# Altium PCB GATEWAY_PCB.PcbDoc (part 1 of 2)
Units mm, origin at the board's own origin, x right, y up, seen from the top; angles counter-clockwise.
Board outline 96.14 x 95.25 mm, 2 copper layers (Top Layer, Bottom Layer); 195 components, 120 nets, 640 pads, 100 vias.
Unrouted connection lines stored in the file: 256.
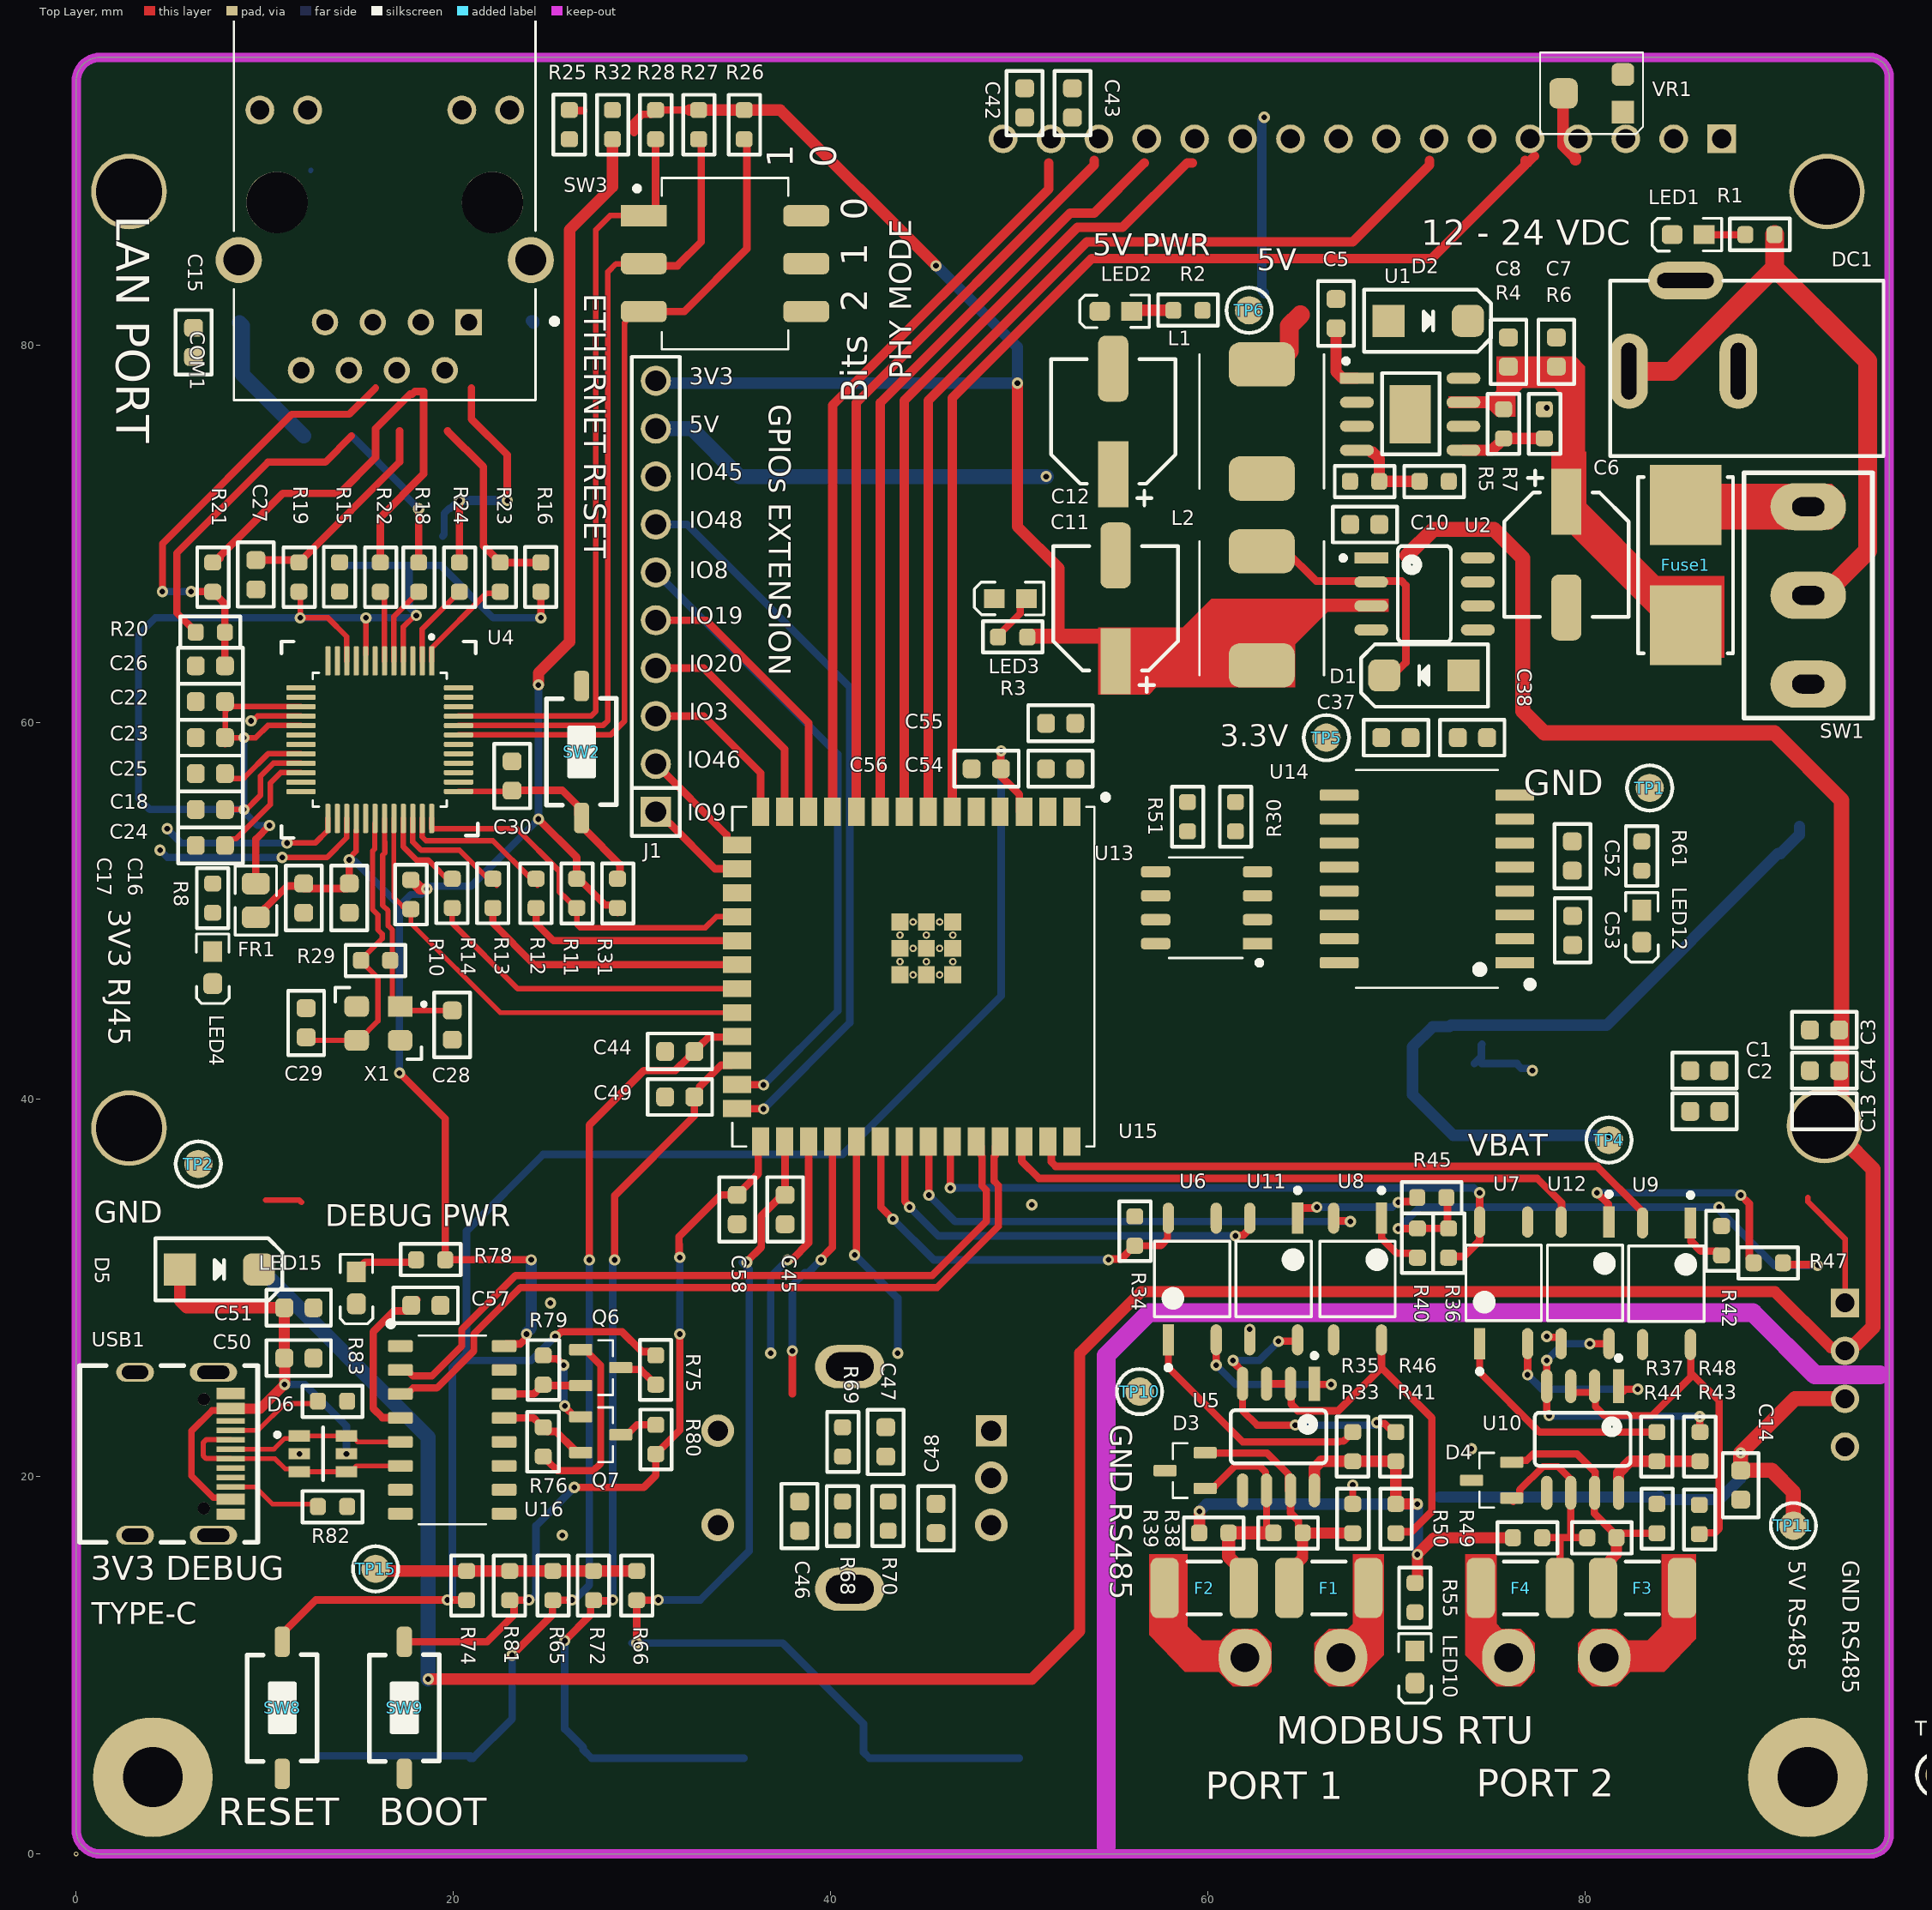
[diagram p0: Top Layer view]
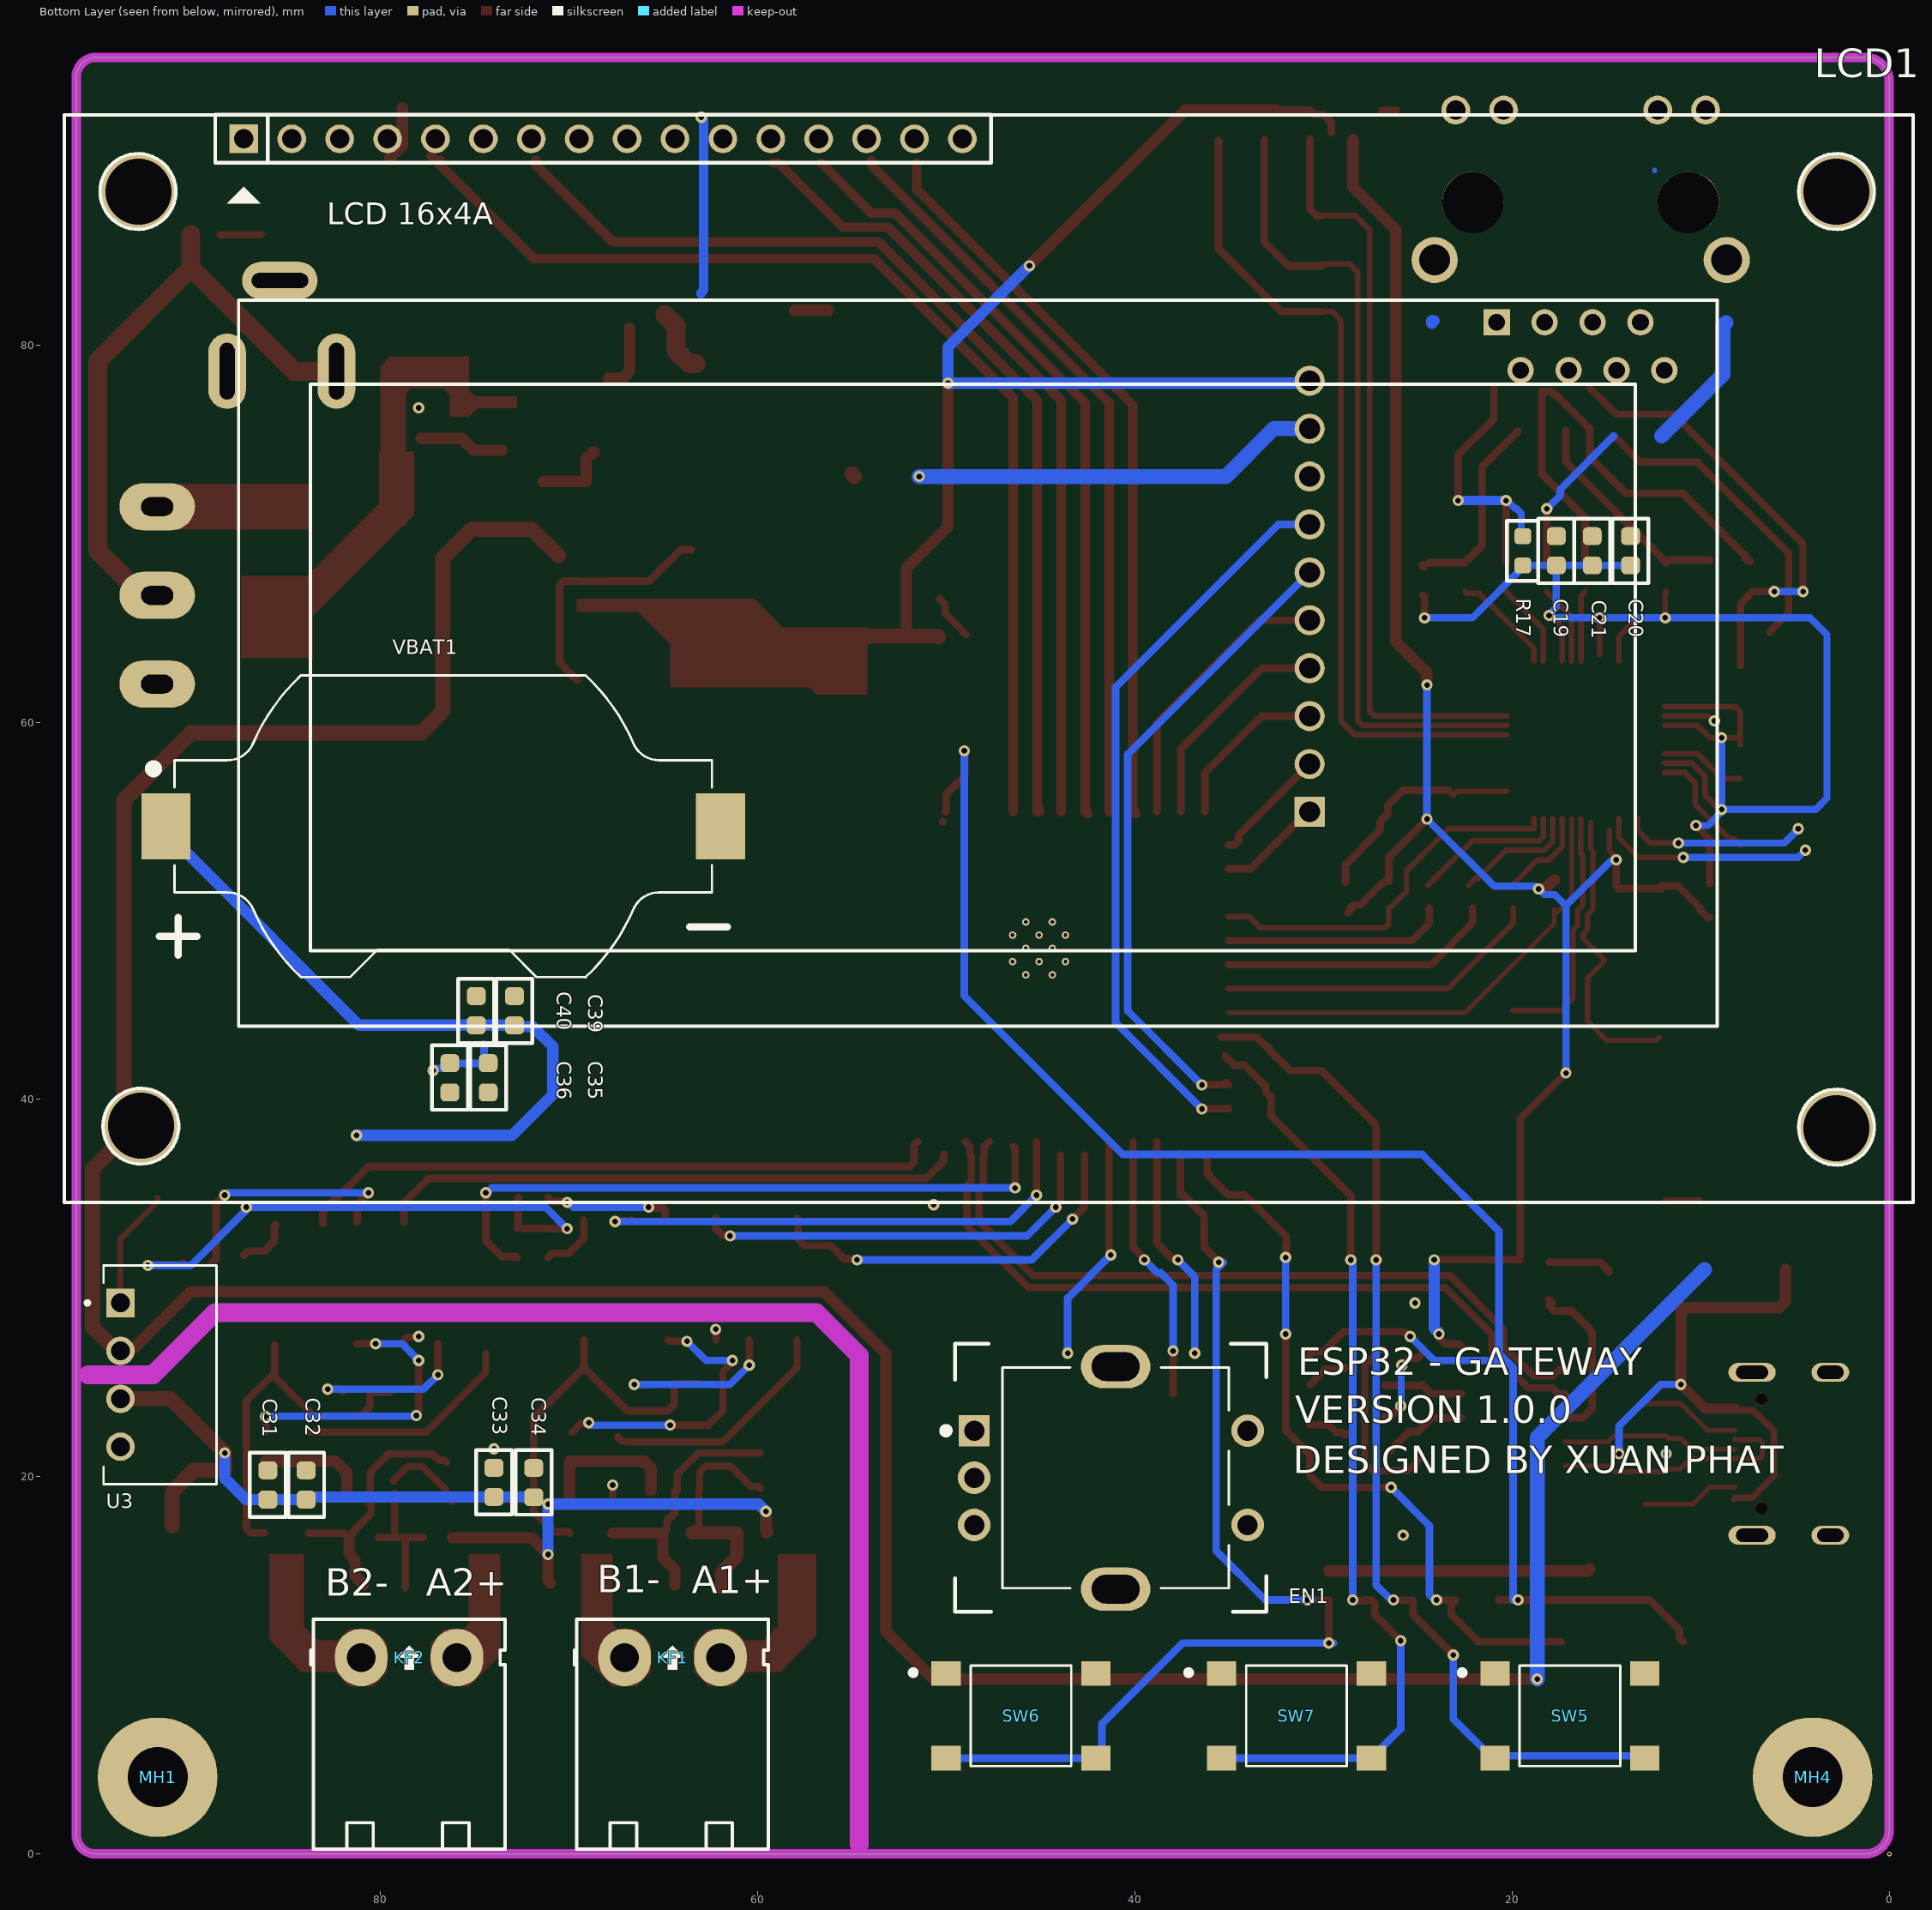
[diagram p1: Bottom Layer view, seen from below]
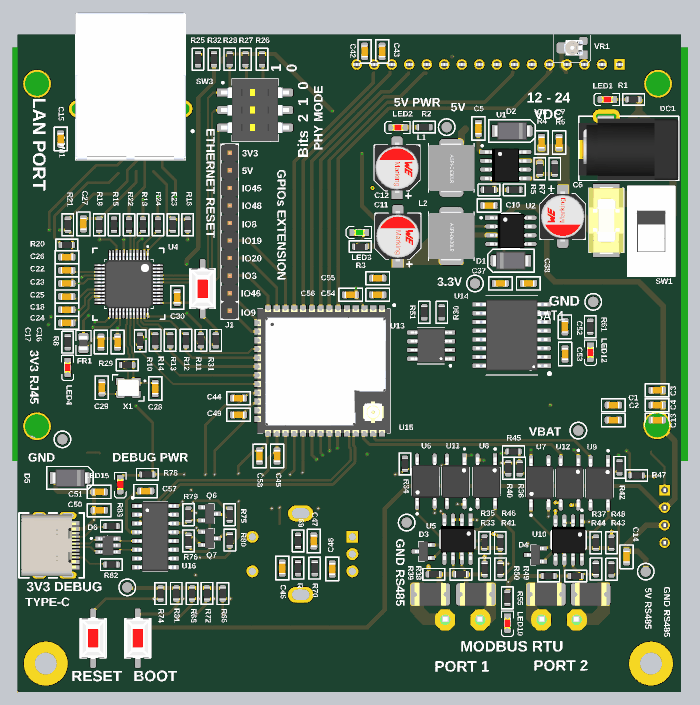
[diagram p3: 3D render of the assembled board from above, using the file's embedded part models]
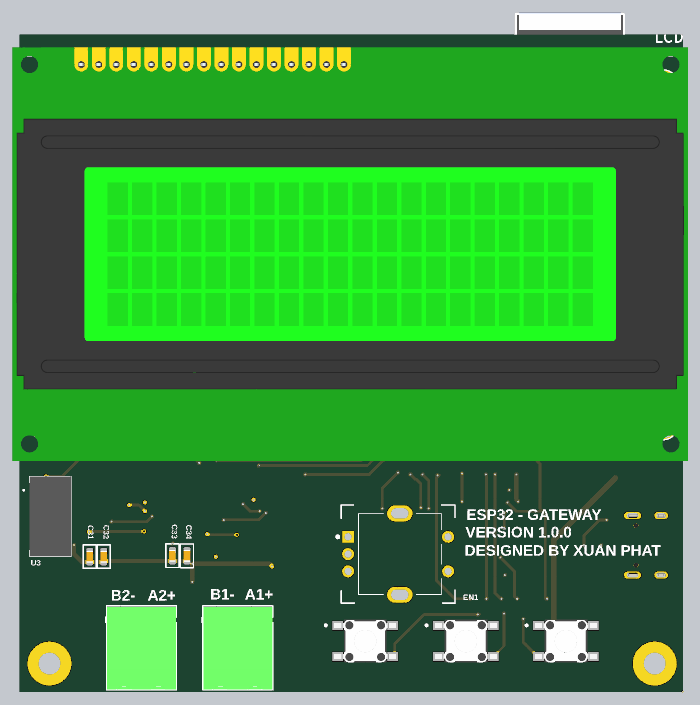
[diagram p4: 3D render of the assembled board from below, using the file's embedded part models]

## Layer stack, top to bottom
Top Solder: solder mask 0.0102, Solder Resist, Dk 3.5
Top Layer: signal copper 0.0356
Dielectric 1: dielectric 0.32, FR-4, Dk 4.8
Bottom Layer: signal copper 0.0356
Bottom Solder: solder mask 0.0102, Solder Resist, Dk 3.5

## Board outline
0,1.27 0,93.98 cw(c1.27,93.98) 1.27,95.25 95.097,95.25 cw(c95.097,94.208) 96.139,94.208 96.139,1.016 cw(c95.123,1.016) 95.123,0 1.27,0 cw(c1.27,1.27)

## Design rules (kind name [scope] priority, off if disabled: settings)
Clearance [All] p1: gap=0.203 ignorepadtopadclearanceinfootprint=TRUE
DiffPairsRouting [All] p1: maxlimit=0.254 minlimit=0.254 mostfreqgap=0.254 toplayer_minwidth=0.254 toplayer_maxwidth=0.381 toplayer_prefwidth=0.381 bottomlayer_minwidth=0.254 bottomlayer_maxwidth=0.381 bottomlayer_prefwidth=0.381 maxuncoupledlength=12.7
PolygonConnect [All] p1: connectstyle=Relief reliefconductorwidth=0.254 reliefentries=4 polygonreliefangle="90 Angle" airgapwidth=0.254
RoutingVias [All] p1: holewidth=0.3 width=0.6 viastyle="Through Hole" minholewidth=0.3 minwidth=0.6 maxholewidth=0.8 maxwidth=1
SolderMaskExpansion [All] p1: expansion=0.102 istentingtop=FALSE
SupplyNets "Schematic Supply Nets_10" [InNet('+VCC')] p1: voltage=0.000
SupplyNets "Schematic Supply Nets_9" [InNet('+5V_RS485')] p2: voltage=0.000
SupplyNets "Schematic Supply Nets_8" [InNet('+3.3V')] p3: voltage=0.000
SupplyNets "Schematic Supply Nets_5" [InNet('GND')] p4: voltage=0.000
SupplyNets "Schematic Supply Nets" [InNet('+5V')] p5: voltage=0.000
SupplyNets "Schematic Supply Nets_7" [InNet('+3.3V_RJ45')] p6: voltage=0.000
SupplyNets "Schematic Supply Nets_6" [InNet('VBAT')] p7: voltage=0.000
SupplyNets "Schematic Supply Nets_4" [InNet('VBUS')] p8: voltage=0.000
SupplyNets "Schematic Supply Nets_2" [InNet('GND_RS485')] p9: voltage=0.000
SupplyNets "Schematic Supply Nets_1" [InNet('GND_RJ45')] p10: voltage=0.000
UnRoutedNet [All] p1: checkbadconnections=TRUE
Width [All] p1: maxlimit=1.5 minlimit=0.25 preferedwidth=0.4
28 further rules are at their usual default settings.

## Classes and differential pairs
component class User_Interface: C42 C43 C44 C45 C46 C47 C48 C49 EN1 LCD1 R65 R66 R68 R69 R70 R72 SW5 SW6 SW7 VR1
component class RTC_and_EEPROM: C35 C36 C37 C38 C39 C40 LED12 MH1 MH3 MH4 R30 R51 R61 U13 U14
component class RS485_Port: C31 C32 C33 C34 D3 D4 F1 F2 F3 F4 KF1 KF2 LED10 R33 R34 R35 R36 R37 R38 R39 R40 R41 R42 R43 R44 R45 R46 R47 R48 R49 R50 R55 TP10 TP11 U5 U6 U7 U8 U9 U10 U11 U12
component class Power_Supply: C1 C2 C3 C4 C5 C6 C7 C8 C10 C11 C12 C13 C14 D1 D2 DC1 Fuse1 L1 L2 LED1 LED2 LED3 R1 R2 R3 R4 R5 R6 R7 SW1 TP1 TP2 TP4 TP5 TP6 U1 U2 U3 VBAT1 VCC
component class MCU: C50 C51 C52 C53 C54 C55 C56 C57 C58 D5 D6 J1 LED5 LED15 Q6 Q7 R9 R74 R75 R76 R78 R79 R80 R81 R82 R83 SW8 SW9 TP3 TP15 U15 U16 USB1
component class Ethernet: C15 C16 C17 C18 C19 C20 C21 C22 C23 C24 C25 C26 C27 C28 C29 C30 COM1 FR1 LED4 R8 R10 R11 R12 R13 R14 R15 R16 R17 R18 R19 R20 R21 R22 R23 R24 R25 R26 R27 R28 R29 R31 R32 SW2 SW3 U4 X1
differential pair I2C: +I2C_P -I2C_N
differential pair DEBUG_D: +DEBUG_D_P -DEBUG_D_N
differential pair CRYSTAL: +CRYSTAL_P -CRYSTAL_N
differential pair DATA_D: +DATA_D_P -DATA_D_N

## Components (designator, comment, footprint, x,y, rotation, side; value= is the part's Value field where it differs from the comment)
C1 "10uF/50V" "CAP - 0603" 86.36,41.529 r180 top
C2 "0.1uF/50V" "CAP - 0603" 86.36,39.37 r180 top
C3 "10uF/50V" "CAP - 0603" 92.71,43.688 r180 top
C4 "0.1uF/50V" "CAP - 0603" 92.71,41.529 r180 top
C5 "10nF/50V" "CAP - 0603" 66.802,81.661 r90 top
C6 "100uF/35V" ALU_CAP_6.3_7.7 79.019,68.885 r270 top
C7 "4.7uF/50V" "CAP - 0603" 78.486,79.629 r90 top
C8 "4.7uF/50V" "CAP - 0603" 75.946,79.629 r90 top
C10 "10uF/50V" "CAP - 0603" 68.326,70.485 r0 top
C11 "330uF/6.3V" ALU_CAP_6.3_7.7 55.118,66.04 r90 top
C12 "220uF/16V" ALU_CAP_6.3_7.7 54.991,75.946 r90 top
C13 "4.7uF/50V" "CAP - 0603" 92.71,39.37 r180 top
C14 "10uF/50V" "CAP - 0603" 88.265,19.558 r270 top
C15 "1nF/50V" "CAP - 0603" 6.223,80.137 r90 top
C16 "10uF/50V" "CAP - 0603" 14.478,50.673 r90 top
C17 "100nF/50V" "CAP - 0603" 12.065,50.673 r90 top
C18 "100nF/50V" "CAP - 0603" 7.112,55.372 r0 top
C19 "100nF/50V" "CAP - 0603" 17.653,69.088 r270 bottom
C20 "100nF/50V" "CAP - 0603" 13.716,69.088 r270 bottom
C21 "100nF/50V" "CAP - 0603" 15.748,69.088 r270 bottom
C22 "100nF/50V" "CAP - 0603" 7.112,61.087 r0 top
C23 "100nF/50V" "CAP - 0603" 7.112,59.182 r0 top
C24 "10nF/50V" "CAP - 0603" 7.112,53.467 r0 top
C25 "4.7uF/50V" "CAP - 0603" 7.112,57.277 r0 top
C26 "10nF/50V" "CAP - 0603" 7.112,62.992 r0 top
C27 "22nF/50V" "CAP - 0603" 9.525,67.818 r90 top
C28 "18pF/50V" "CAP - 0603" 19.939,43.942 r90 top
C29 "18pF/50V" "CAP - 0603" 12.192,44.069 r270 top
C30 "0.1uF/50V" "CAP - 0603" 23.114,57.15 r270 top
C31 "0.1uF/50V" "CAP - 0603" 85.979,19.558 r90 bottom
C32 "0.1uF/50V" "CAP - 0603" 83.947,19.558 r90 bottom
C33 "0.1uF/50V" "CAP - 0603" 73.986,19.697 r90 bottom
C34 "0.1uF/50V" "CAP - 0603" 71.882,19.685 r90 bottom
C35 "10uF/50V" "CAP - 0603" 74.295,41.148 r90 bottom
C36 "0.1uF/50V" "CAP - 0603" 76.327,41.148 r90 bottom
C37 "10uF/50V" "CAP - 0603" 69.977,59.182 r0 top
C38 "0.1uF/50V" "CAP - 0603" 74.041,59.182 r180 top
C39 "10uF/50V" "CAP - 0603" 72.898,44.704 r270 bottom
C40 "0.1uF/50V" "CAP - 0603" 74.93,44.704 r270 bottom
C42 "10uF/50V" "CAP - 0603" 50.292,92.837 r270 top
C43 "0.1uF/50V" "CAP - 0603" 52.832,92.837 r270 top
C44 "0.1uF/50V" "CAP - 0603" 32.004,42.545 r0 top
C45 "0.1uF/50V" "CAP - 0603" 37.592,34.163 r90 top
C46 "0.1uF/50V" "CAP - 0603" 38.354,17.907 r90 top
C47 "0.1uF/50V" "CAP - 0603" 42.926,21.844 r270 top
C48 "0.1uF/50V" "CAP - 0603" 45.593,17.78 r90 top
C49 "0.1uF/50V" "CAP - 0603" 32.004,40.132 r0 top
C50 "0.1uF/50V" "CAP - 0603" 11.811,26.289 r180 top
C51 "10uF/50V" "CAP - 0603" 11.811,28.956 r180 top
C52 "10uF/50V" "CAP - 0603" 79.337,52.905 r270 top
C53 "0.1uF/50V" "CAP - 0603" 79.351,48.958 r90 top
C54 "10uF/50V" "CAP - 0603" 52.197,57.531 r180 top
C55 "0.1uF/50V" "CAP - 0603" 52.197,59.944 r180 top
C56 "0.1uF/50V" "CAP - 0603" 48.26,57.531 r0 top
C57 "100nF/50V" "CAP - 0603" 18.542,29.083 r180 top
C58 "0.1uF/50V" "CAP - 0603" 35.052,34.163 r90 top
COM1 "RJ45" RJ45 16.362,87.556 r0 top
D1 "SS54" SS54 73.595,62.472 r180 top
D2 "SS54" SS54 69.564,81.291 r0 top
D3 "SM712-02HTG" SOT23-3 58.801,20.32 r180 top
D4 "SM712-02HTG" SOT23-3 75.057,19.812 r180 top
D5 "SS54" SS54 5.461,30.988 r0 top
D6 "SRV05-4" SOT-23-6 13.081,21.209 r0 top
DC1 "Jack_DC" "DC_5.5 X 2.1MM" 85.238,78.613 r180 top
EN1 "Encoder - EC11" "ENCODER - EC11" 41.021,19.939 r180 bottom locked
F1 "MF-MSMF020-2" "FUSE 4.55X3.24 MM" 66.421,14.097 r0 top
F2 "MF-MSMF020-2" "FUSE 4.55X3.24 MM" 59.817,14.097 r180 top
F3 "MF-MSMF020-2" "FUSE 4.55X3.24 MM" 83.058,14.097 r0 top
F4 "MF-MSMF020-2" "FUSE 4.55X3.24 MM" 76.581,14.097 r180 top
FR1 "120R" FR-0805 9.525,50.546 r90 top
Fuse1 "Fuse - 4A" SMD-2 85.344,68.326 r270 top
J1 "Jump 10 Pins" JPX1-10PINS-2.54MM 30.734,55.245 r90 top
KF1 "KF 2 Pins" KF-5.08-2-R 67.056,10.414 r180 bottom
KF2 "KF 2 Pins" KF-5.08-2-R 81.026,10.414 r180 bottom
L1 "15uH/3A" L_SMD_0630 62.865,75.946 r270 top
L2 "22uH/3A" L_SMD_0630 62.865,66.04 r270 top
LCD1 "LCD 20x4A" LCD-20x4A-4-Holes 87.249,90.932 r180 bottom
LED1 "RED" RED_LED_0603 85.471,85.852 r180 top
LED2 "RED" RED_LED_0603 55.118,81.788 r180 top
LED3 "GREEN" GREEN_LED_0603 49.53,66.548 r180 top
LED4 "RED" RED_LED_0603 7.239,46.99 r270 top
LED5 "TEST_LED" RED_LED_0603 106.426,9.144 r90 top
LED10 "RED" RED_LED_0603 70.993,9.906 r270 top
LED12 "RED" RED_LED_0603 83.022,49.185 r270 top
LED15 "RED_DEBUG" RED_LED_0603 14.858,30.009 r270 top
MH1 "MOUNTING HOLE" "MOUNTING HOLE_2" 91.796,4.089 r180 bottom
MH3 "MOUNTING HOLE" "MOUNTING HOLE_2" 11.684,113.03 r0 top
MH4 "MOUNTING HOLE" "MOUNTING HOLE_2" 4.039,4.089 r180 bottom
Q6 "SS8050" SOT23-3 27.813,25.781 r0 top
Q7 "SS8050" SOT23-3 27.813,22.225 r0 top
R1 "10K/1%" "RES - 0603" 89.281,85.852 r180 top
R2 "1K/1%" "RES - 0603" 58.953,81.839 r180 top
R3 "330R/1%" "RES - 0603" 49.657,64.516 r180 top
R4 "10K/1%" "RES - 0603" 75.692,75.819 r270 top
R5 "1K/1%" "RES - 0603" 68.326,72.771 r0 top
R6 "1.5K/1%" "RES - 0603" 77.851,75.819 r90 top
R7 "330R/1%" "RES - 0603" 72.009,72.771 r0 top
R8 "330R/1%" "RES - 0603" 7.239,50.673 r270 top
R9 "330R/1%" "RES - 0603" 103.632,27.686 r0 top
R10 "10K/1%" "RES - 0603" 17.742,50.863 r90 top
R11 "10K/1%" "RES - 0603" 26.543,50.927 r90 top
R12 "22R/1%" "RES - 0603" 24.384,50.927 r270 top
R13 "22R/1%" "RES - 0603" 22.098,50.927 r270 top
R14 "22R/1%" "RES - 0603" 19.939,50.927 r270 top
R15 "12.4K/1%" "RES - 0603" 13.97,67.704 r270 top
R16 "49.9R/1%" "RES - 0603" 24.638,67.691 r270 top
R17 "49.9R/1%" "RES - 0603" 19.431,69.088 r270 bottom
R18 "22R/1%" "RES - 0603" 18.161,67.691 r90 top
R19 "22R/1%" "RES - 0603" 11.811,67.691 r90 top
R20 "49.9R/1%" "RES - 0603" 7.112,64.77 r180 top
R21 "49.9R/1%" "RES - 0603" 7.239,67.691 r90 top
R22 "22R/1%" "RES - 0603" 16.129,67.691 r90 top
R23 "22R/1%" "RES - 0603" 22.479,67.691 r90 top
R24 "22R/1%" "RES - 0603" 20.32,67.691 r90 top
R25 "330R/1%" "RES - 0603" 26.15,91.682 r270 top
R26 "10K/1%" "RES - 0603" 35.421,91.682 r90 top
R27 "10K/1%" "RES - 0603" 33.008,91.682 r90 top
R28 "10K/1%" "RES - 0603" 30.722,91.682 r90 top
R29 "1M/1%" "RES - 0603" 15.875,47.371 r0 top
R30 "4.7K/1%" "RES - 0603" 61.468,54.991 r90 top
R31 "10K/1%" "RES - 0603" 28.702,50.927 r90 top
R32 "330R/1%" "RES - 0603" 28.436,91.682 r90 top
R33 "2.2K/1%" "RES - 0603" 67.691,17.78 r90 top
R34 "2K/1%" "RES - 0603" 56.134,33.02 r90 top
R35 "1K/1%" "RES - 0603" 67.691,21.59 r270 top
R36 "2K/1%" "RES - 0603" 72.771,32.385 r90 top
R37 "1K/1%" "RES - 0603" 83.82,21.59 r270 top
R38 "120R/1%" "RES - 0603" 64.262,17.018 r0 top
R39 "2.2K/1%" "RES - 0603" 60.325,17.018 r0 top
R40 "330R/1%" "RES - 0603" 71.12,32.385 r90 top
R41 "2K/1%" "RES - 0603" 69.977,17.78 r90 top
R42 "330R/1%" "RES - 0603" 87.249,32.512 r90 top
R43 "2K/1%" "RES - 0603" 86.07,17.728 r90 top
R44 "2.2K/1%" "RES - 0603" 83.82,17.78 r90 top
R45 "330R/1%" "RES - 0603" 71.882,34.798 r0 top
R46 "2K/1%" "RES - 0603" 69.977,21.59 r270 top
R47 "330R/1%" "RES - 0603" 89.725,31.339 r0 top
R48 "2K/1%" "RES - 0603" 86.106,21.59 r270 top
R49 "120R/1%" "RES - 0603" 80.899,16.764 r0 top
R50 "2.2K/1%" "RES - 0603" 76.962,16.764 r0 top
R51 "4.7K/1%" "RES - 0603" 58.928,54.991 r90 top
R55 "1K/1%" "RES - 0603" 70.993,13.589 r270 top
R61 "330R/1%" "RES - 0603" 83.02,52.905 r270 top
R65 "10K/1%" "RES - 0603" 25.273,14.224 r90 top
R66 "10K/1%" "RES - 0603" 29.718,14.224 r90 top
R68 "10K/1%" "RES - 0603" 40.64,17.907 r270 top
R69 "10K/1%" "RES - 0603" 40.64,21.844 r90 top
R70 "10K/1%" "RES - 0603" 43.053,17.907 r270 top
R72 "10K/1%" "RES - 0603" 27.432,14.224 r270 top
R74 "10K/1%" "RES - 0603" 20.701,14.224 r90 top
R75 "0R/1%" "RES - 0603" 30.734,25.654 r270 top
R76 "10K/1%" "RES - 0603" 24.765,21.844 r270 top
R78 "330R/1%" "RES - 0603" 18.796,31.496 r180 top
R79 "10K/1%" "RES - 0603" 24.765,25.654 r90 top
R80 "0R/1%" "RES - 0603" 30.734,21.971 r90 top
R81 "10K/1%" "RES - 0603" 22.987,14.224 r270 top
R82 "5.1K/1%" "RES - 0603" 13.589,18.415 r0 top
R83 "5.1K/1%" "RES - 0603" 13.589,24.003 r0 top
SW1 "Switch" DIP_SWITCH_3_PINS_0 91.846,66.725 r270 top
SW2 "Button 2 Pins" "SMD SWITCH 2 PINS" 26.797,58.42 r270 top
SW3 "DIP Switch 3 Pins" "SMD - SW - 3PINS" 34.405,84.316 r0 top
SW5 "Button 4 Pins" SW-SMD-6X6MM 16.931,7.322 r180 bottom
SW6 "Button 4 Pins" SW-SMD-6X6MM 46.04,7.322 r180 bottom
SW7 "Button 4 Pins" SW-SMD-6X6MM 31.435,7.322 r180 bottom
SW8 "Button 2 Pins" "SMD SWITCH 2 PINS" 10.922,7.747 r90 top
SW9 "Button 2 Pins" "SMD SWITCH 2 PINS" 17.399,7.747 r90 top
TP1 "GND" "TEST POINT" 83.439,56.515 r0 top
TP2 "GND" "TEST POINT" 6.477,36.576 r0 top
TP3 "DEBUG PWR" "TEST POINT" 98.806,4.191 r0 top
TP4 "VBAT" "TEST POINT" 81.28,37.846 r0 top
TP5 "+3.3V" "TEST POINT" 66.294,59.182 r0 top
TP6 "+5V" "TEST POINT" 62.195,81.839 r0 top
TP10 "GND_RS485" "TEST POINT" 56.388,24.511 r90 top
TP11 "GND_RS485" "TEST POINT" 91.059,17.399 r90 top
TP15 "DEBUG PWR" "TEST POINT" 15.875,15.113 r90 top
U1 "TPS5430" TPS5430 70.764,76.352 r0 top
U2 "XL1509" SOP_8 71.501,66.802 r0 top
U3 "B0505S/1W" B0505S/1W 91.694,25.4 r270 bottom
U4 "W5500" LQFP-48 16.096,59.073 r270 top
U5 "MAX485ESA" SOP_8 63.754,22.098 r270 top
U6 "TLP185" SOP-4 59.182,30.48 r90 top
U7 "TLP185" SOP-4 75.692,30.276 r90 top
U8 "TLP185" SOP-4 67.945,30.48 r270 top
U9 "TLP185" SOP-4 84.328,30.226 r270 top
U10 "MAX485ESA" SOP_8 79.883,21.971 r270 top
U11 "TLP185" SOP-4 63.5,30.48 r270 top
U12 "TLP185" SOP-4 80.01,30.276 r270 top
U13 "AT24C256C" SOIC-8 59.944,50.165 r180 top
U14 "DS3231SN#" "SOIC -16" 71.628,51.689 r180 top
U15 "ESP32-S3-WROOM-1U-N8R2" ESP32-S3-WROOM-1U-N8R2 52.802,55.259 r270 top
U16 "CH340C" SOIC127P600X180-16N 19.939,22.479 r0 top
USB1 "USB Type C" TYPE-C-16PINS 4.191,21.209 r270 top
VBAT1 "3V" "CR2032 - SMD" 76.676,54.483 r180 bottom locked
VR1 "20K" "VR 3X3" 80.417,93.345 r90 top
X1 "CRYSTAL 8MHz" "CRYSTAL - 3.2 X 2.5 MM" 16.024,44.031 r180 top

## Footprints (in the part's own frame and the unit in brackets; to place one, negate y for a bottom-side part, rotate by r counter-clockwise, add the part's x,y. Pads: shape width x height; smd on the part's side, far side on the other; paste and mask are expansions set on the pad)
ALU_CAP_6.3_7.7 [mm] "6.3x7.7mm"
  rect 3.5x1.6 smd: 1(-2.8,0)
  rrect50% 3.5x1.6 smd: 2(2.8,0)
  silkscreen extent -4.44,-3.3 3.3,3.3, body extent -3.65,-3.3 3.65,3.3, height 7.65
B0505S/1W [mm]
  rect 1.508x1.508 / inner round 1.508 / far side rect 1.508x1.508 hole 1: 1(-3.81,-2.1)
  round 1.508 hole 1: 2(-1.27,-2.1) 3(1.27,-2.1) 4(3.81,-2.1)
  silkscreen extent -5.8,-3.95 5.8,3, body extent -5.8,-3.01 5.8,2.99, height 10.16
"CAP - 0603" [mm] "Capacitor SMD - 1608 - KEMET"
  rrect50% 0.95x1 smd: 1(-0.775,0) 2(0.775,0)
  silkscreen extent -1.7,-0.95 1.72,0.95, body extent -0.87,-0.48 0.87,0.48, height 1
"CR2032 - SMD" [mm] "SMD"
  rect 2.6x3.5 smd: N(14.7,0) P(-14.7,0)
  silkscreen extent -15.42,-8.01 15.06,8.01, body extent -15.65,-8 15.65,8, height 5.55
"CRYSTAL - 3.2 X 2.5 MM" [mm] "SMD"
  rect 1.3x1.1 smd: 1(-1.15,-0.9)
  rrect50% 1.3x1.1 smd: 2(1.15,-0.9) 3(1.15,0.9) 4(-1.15,0.9)
  silkscreen extent -2.51,-1.9 2.29,1.9, body extent -1.6,-1.25 1.6,1.25, height 0.8
"DC_5.5 X 2.1MM" [mm]
  oval 2x4 hole 0.8 slot 3 at 90 deg: 1(2.9,0) 2(-2.9,0)
  oval 4x2 hole 0.8 slot 3 at 0 deg: 3(-0.1,-4.8)
  silkscreen extent -10.6,-4.8 3.9,4.5, body extent -10.6,-4.9 3.9,4.5, height 10.7
DIP_SWITCH_3_PINS_0 [mm]
  oval 2.5x4 hole 1 slot 1.7 at 90 deg: 1(-4.7,0) 2(0,0) 3(4.7,0)
  silkscreen extent -6.5,-3.4 6.5,3.4, body extent -6.5,-3.4 6.5,3.4, height 10.76
"ENCODER - EC11" [mil]
  rect 65x65 / inner round 65 / far side rect 65x65 hole 42: A(-295.28,98.43)
  round 68 hole 42: B(-295.28,-98.43) C(-295.28,0) D(275.59,98.43) E(275.59,-98.43)
  oval 145x90 hole 60 slot 100 at 0 deg: SH1(0,232.28) SH2(0,-232.28)
  silkscreen extent -358,-280 315,280, body extent -303,-276 283,276, height 834
ESP32-S3-WROOM-1U-N8R2 [mm] "SMD"
  rect 1.5x0.9 smd: 1(0,0) 2(0,-1.27) 3(0,-2.54) 4(0,-3.81) 5(0,-5.08) 6(0,-6.35) 7(0,-7.62) 8(0,-8.89) 9(0,-10.16) 10(0,-11.43) 11(0,-12.7) 12(0,-13.97) 13(0,-15.24) 14(0,-16.51) 27(17.5,-16.51) 28(17.5,-15.24) 29(17.5,-13.97) 30(17.5,-12.7) 31(17.5,-11.43) 32(17.5,-10.16) 33(17.5,-8.89) 34(17.5,-7.62) 35(17.5,-6.35) 36(17.5,-5.08) 37(17.5,-3.81) 38(17.5,-2.54) 39(17.5,-1.27) 40(17.5,0)
  rect 0.9x1.5 smd: 15(1.765,-17.76) 16(3.035,-17.76) 17(4.305,-17.76) 18(5.575,-17.76) 19(6.845,-17.76) 20(8.115,-17.76) 21(9.385,-17.76) 22(10.655,-17.76) 23(11.925,-17.76) 24(13.195,-17.76) 25(14.465,-17.76) 26(15.735,-17.76)
  rect 0.9x0.9 smd: 41_1(5.85,-6.32) 41_2(7.25,-6.32) 41_3(8.65,-6.32) 41_4(5.85,-7.72) 41_5(7.25,-7.72) 41_6(8.65,-7.72) 41_7(5.85,-9.12) 41_8(7.25,-9.12) 41_9(8.65,-9.12)
  round 0.4 hole 0.2 mask+0: 41_10(6.55,-6.32) 41_11(7.95,-6.32) 41_12(5.85,-7.02) 41_13(7.25,-7.02) 41_14(8.65,-7.02) 41_15(6.55,-7.72) 41_16(7.95,-7.72) 41_17(5.85,-8.42) 41_18(7.25,-8.42) 41_19(8.65,-8.42) 41_20(6.55,-9.12) 41_21(7.95,-9.12)
  silkscreen extent -0.86,-18.01 17.75,1.88, body extent -0.25,-18.01 17.75,1.19, height 3.35
FR-0805 [mm] "SMD"
  rrect50% 1.14x1.47 smd: 1(-0.89,0) 2(0.89,0)
  silkscreen extent -1.84,-1.1 1.83,1.1, body extent -1,-0.63 1,0.63, height 1.05
"FUSE 4.55X3.24 MM" [mm]
  rrect50% 1.5x3.2 smd: 1(-2.1,0) 2(2.1,0)
  silkscreen extent -0.89,-1.4 0.89,1.4, body extent -2.27,-1.62 2.27,1.62, height 0.85
GREEN_LED_0603 [mm] "SMD"
  rect 1.1x1 smd mask+0.1: 1(-0.853,-0.002) 2(0.847,-0.002)
  silkscreen extent -1.78,-0.88 1.91,0.86, body extent -0.81,-0.51 0.81,0.49, height 0.98
JPX1-10PINS-2.54MM [mm] "DIP"
  rect 1.6x1.6 hole 1.1: 1(0,0)
  round 1.6 hole 1.1: 2(2.54,0) 3(5.08,0) 4(7.62,0) 5(10.16,0) 6(12.7,0) 7(15.24,0) 8(17.78,0) 9(20.32,0) 10(22.86,0)
  silkscreen extent -1.27,-1.27 24.13,1.27, body extent -1.27,-1.27 24.13,1.27, height 8.54
KF-5.08-2-R [mil]
  oval 110x120 hole 60: 1(0,0) 2(200,0)
  silkscreen extent -105,-400 300,80, body extent -97,-399 297,73, height 334
L_SMD_0630 [mm] "SMD"
  rrect50% 2.35x3.5 smd: 1(-3.025,0) 2(3.025,0)
  silkscreen extent -3.55,-3.3 3.55,3.3, body extent -3.6,-3.32 3.6,3.32, height 3.03
LCD-20x4A-4-Holes [mm]
  rect 1.52x1.52 hole 1.02: 1(0,0)
  round 1.52 hole 1.02: 2(2.54,0) 3(5.08,0) 4(7.62,0) 5(10.16,0) 6(12.7,0) 7(15.24,0) 8(17.78,0) 9(20.32,0) 10(22.86,0) 11(25.4,0) 12(27.94,0) 13(30.48,0) 14(33.02,0) 15(35.56,0) 16(38.1,0)
  round 4 hole 3.5: "Hole 0"(-5.588,-2.794) "Hole 0"(-5.461,-52.324) "Hole 0"(84.455,-52.451) "Hole 0"(84.455,-2.794)
  silkscreen extent -9.53,-56.39 88.52,1.27, body extent -9.96,-57.51 88.04,2.49, height 19.19
LQFP-48 [mm]
  rect 1.56x0.28 smd: 1(-4.18,2.75)
  rrect50% 1.56x0.28 smd: 2(-4.18,2.25) 3(-4.18,1.75) 4(-4.18,1.25) 5(-4.18,0.75) 6(-4.18,0.25) 7(-4.18,-0.25) 8(-4.18,-0.75) 9(-4.18,-1.25) 10(-4.18,-1.75) 11(-4.18,-2.25) 12(-4.18,-2.75) 25(4.18,-2.75) 26(4.18,-2.25) 27(4.18,-1.75) 28(4.18,-1.25) 29(4.18,-0.75) 30(4.18,-0.25) 31(4.18,0.25) 32(4.18,0.75) 33(4.18,1.25) 34(4.18,1.75) 35(4.18,2.25) 36(4.18,2.75)
  rrect50% 0.28x1.56 smd: 13(-2.75,-4.18) 14(-2.25,-4.18) 15(-1.75,-4.18) 16(-1.25,-4.18) 17(-0.75,-4.18) 18(-0.25,-4.18) 19(0.25,-4.18) 20(0.75,-4.18) 21(1.25,-4.18) 22(1.75,-4.18) 23(2.25,-4.18) 24(2.75,-4.18) 37(2.75,4.18) 38(2.25,4.18) 39(1.75,4.18) 40(1.25,4.18) 41(0.75,4.18) 42(0.25,4.18) 43(-0.25,4.18) 44(-0.75,4.18) 45(-1.25,4.18) 46(-1.75,4.18) 47(-2.25,4.18) 48(-2.75,4.18)
  silkscreen extent -5.55,-5.21 5.21,5.21, body extent -4.5,-4.5 4.5,4.5, height 1.6
"MOUNTING HOLE_2" [mil]
  round 250 hole 125.2: 1(-1,-1)
RED_LED_0603 [mm] "SMD"
  rect 1.1x1 smd mask+0.1: 1(-0.852,0.001)
  rrect50% 1.1x1 smd mask+0.1: 2(0.848,0.001)
  silkscreen extent -1.78,-0.87 1.91,0.87, body extent -0.81,-0.5 0.81,0.5, height 0.98
"RES - 0603" [mm] "Resistor SMD - 1.6x0.8mm - YAGEO"
  rrect50% 0.85x0.9 smd: 1(-0.775,0) 2(0.775,0)
  silkscreen extent -1.59,-0.85 1.59,0.82, body extent -0.85,-0.45 0.85,0.45, height 0.55
RJ45 [mm]
  rect 1.398x1.398 / inner round 1.398 / far side rect 1.398x1.398 hole 0.89: 1(4.45,-6.35)
  round 1.398 hole 0.89: 2(3.18,-8.89) 3(1.91,-6.35) 4(0.64,-8.89) 5(-0.63,-6.35) 6(-1.9,-8.89) 7(-3.17,-6.35) 8(-4.44,-8.89)
  round 1.53 hole 1.02: 9(6.625,4.9) 10(4.085,4.9) 11(-4.085,4.9) 12(-6.625,4.9)
  round 2.445 hole 1.63: 15(7.745,-3.05) 16(-7.745,-3.05)
  round 3.25 hole 3.25 unplated: ""(-5.715,0) ""(5.715,0)
  silkscreen extent -8,-10.48 9.15,10.92, body extent -8.02,-10.4 8.02,10.9, height 13.5
"SMD - SW - 3PINS" [mm] "Pitch - 2.54mm"
  rect 2.44x1.13 smd: 1(-4.305,2.54)
  rrect50% 2.44x1.13 smd: 1_1(4.305,2.54) 2(-4.305,0) 2_1(4.305,0) 3(-4.305,-2.54) 3_1(4.305,-2.54)
  silkscreen extent -4.78,-4.54 3.35,4.54, body extent -4.95,-4.54 4.95,4.54, height 4.2
"SMD SWITCH 2 PINS" [mm] "SMD"
  rrect50% 1.6x0.8 smd: 1(-3.502,0) 2(3.498,0)
  silkscreen extent -2.84,-1.85 2.82,1.85, body extent -3.05,-1.85 3.05,1.85, height 2.5
SMD-2 [mil]
  rect 167x150 smd paste+0 mask+4.02: 1(-125.5,0) 2(125.5,0)
  silkscreen extent -184,-99 184,99, body extent -192,-99 192,99, height 150
SOIC127P600X180-16N [mm]
  rrect25% 1.31x0.62 smd: 1(-2.75,4.445) 2(-2.75,3.175) 3(-2.75,1.905) 4(-2.75,0.635) 5(-2.75,-0.635) 6(-2.75,-1.905) 7(-2.75,-3.175) 8(-2.75,-4.445) 9(2.75,-4.445) 10(2.75,-3.175) 11(2.75,-1.905) 12(2.75,-0.635) 13(2.75,0.635) 14(2.75,1.905) 15(2.75,3.175) 16(2.75,4.445)
  silkscreen extent -3.36,-5 1.78,5.73, body extent -3,-5 3,5, height 1.8
"SOIC -16" [mm] "SMD"
  rect 2.05x0.59 smd: 1(-4.655,4.445)
  rrect25% 2.05x0.59 smd: 2(-4.655,3.175) 3(-4.655,1.905) 4(-4.655,0.635) 5(-4.655,-0.635) 6(-4.655,-1.905) 7(-4.655,-3.175) 8(-4.655,-4.445) 9(4.655,-4.445) 10(4.655,-3.175) 11(4.655,-1.905) 12(4.655,-0.635) 13(4.655,0.635) 14(4.655,1.905) 15(4.655,3.175) 16(4.655,4.445)
  silkscreen extent -5.56,-5.77 3.75,5.77, body extent -5.16,-5.15 5.16,5.15, height 2.65
SOIC-8 [mm] "SMD"
  rect 1.55x0.6 smd: 1(-2.7,1.905)
  rrect50% 1.55x0.6 smd: 2(-2.7,0.635) 3(-2.7,-0.635) 4(-2.7,-1.905) 5(2.7,-1.905) 6(2.7,-0.635) 7(2.7,0.635) 8(2.7,1.905)
  silkscreen extent -2.92,-2.67 2,3.05, body extent -3,-2.46 3,2.46, height 1.75
SOP-4 [mm]
  rect 1.65x0.6 smd: 1(-3.225,1.27)
  oval 1.65x0.6 smd: 2(-3.225,-1.27) 3(3.225,-1.27) 4(3.225,1.27)
  silkscreen extent -4.82,-2 2,2, body extent -3.5,-2 3.5,2, height 2.2
SOP_8 [mm]
  rect 1.8x0.6 smd: 1(-2.825,1.905)
  oval 1.8x0.6 smd: 2(-2.825,0.635) 3(-2.825,-0.635) 4(-2.825,-1.905) 5(2.825,-1.905) 6(2.825,-0.635) 7(2.825,0.635) 8(2.825,1.905)
  silkscreen extent -4.44,-2.54 1.4,2.54, body extent -2.99,-2.45 3,2.45, height 1.6
SOT23-3 [mm] "SMD"
  rrect25% 1.23x0.6 smd paste+0 mask+0.102: 1(-1.06,0.95) 2(-1.06,-0.95) 3(1.06,0)
  silkscreen extent -0.13,-1.45 0.65,1.45, body extent -1.2,-1.45 1.2,1.45, height 1.11
SOT-23-6 [mm] "SMD"
  rect 1.15x0.6 smd: 1(-1.25,0.95) 2(-1.25,0) 3(-1.25,-0.95) 4(1.25,-0.95) 5(1.25,0) 6(1.25,0.95)
  silkscreen extent -2.52,-1.4 0,1.4, body extent -1.4,-1.45 1.4,1.45, height 1.45
SS54 [mm] "DIODE SCHOTTKY 40V 5A SMA"
  rect 1.7x1.7 smd: 1(0.032,-0.011)
  rrect50% 1.7x1.7 smd: 2(4.232,-0.011)
  silkscreen extent -1.27,-1.65 5.46,1.65, body extent -0.47,-1.31 4.73,1.29, height 2.4
SW-SMD-6X6MM [mm] "SMD"
  rect 1.55x1.3 smd: 1(-3.975,2.25) 1(3.975,2.25) 2(-3.975,-2.25) 2(3.975,-2.25)
  silkscreen extent -5.75,-2.67 2.67,2.67, body extent -4.5,-3.1 4.5,3.1, height 4.99
"TEST POINT" [mm]
  round 1.5 smd: 1(0,0)
  silkscreen extent -1.2,-1.2 1.2,1.2
TPS5430 [mm]
  rect 1.8x0.6 smd: 1(-2.85,1.88)
  oval 1.8x0.6 smd: 2(-2.85,0.61) 3(-2.85,-0.66) 4(-2.85,-1.93) 5(2.8,-1.93) 6(2.8,-0.66) 7(2.8,0.61) 8(2.8,1.88)
  rect 2.2x3.1 smd: 9(-0.025,-0.025)
  silkscreen extent -3.55,-2.16 1.52,2.92, body extent -3.02,-2.48 2.97,2.42, height 1.6
TYPE-C-16PINS [mm]
  rect 0.6x1.5 smd: A1(-3.202,4) A4(-2.402,4) B1(3.198,4) B4(2.398,4)
  rect 0.3x1.5 smd: A5(-1.252,4) A6(-0.252,4) A7(0.248,4) A8(-1.752,4) B5(1.748,4) B6(0.748,4) B7(-0.752,4) B8(1.248,4)
  oval 1x2.5 hole 0.7 slot 1.7 at 90 deg: SHIELD(-4.322,3.083) SHIELD(4.318,3.083)
  oval 1x2 hole 0.7 slot 1.4 at 90 deg: SHIELD(-4.322,-1.067) SHIELD(4.318,-1.067)
  round 0.65 hole 0.65 mask+0.102: SHIELD(-2.892,2.583) SHIELD(2.888,2.583)
  silkscreen extent -4.68,-4 4.69,5.43, body extent -4.47,-3.65 4.47,4.25, height 3.21
"VR 3X3" [mm]
  rect 1.2x1.2 smd mask+0.051: 1(-1,-1.6)
  rrect50% 1.6x1.5 smd mask+0.051: 2(0,1.55)
  rrect50% 1.2x1.2 smd mask+0.051: 3(1,-1.6)
  silkscreen extent -2.16,-2.67 2.16,2.79, body extent -1.1,-1.56 1.1,1.25, height 0.81

## Part data
C1 C2 C3 C4 C5 C7 C8 C10 C13 C14 C15 C16 C17 C18 C19 C20 C21 C22 C23 C24 C25 C26 C27 C28 C29 C30 C31 C32 C33 C34 C35 C36 C37 C38 C39 C40 C42 C43 C44 C45 C46 C47 C48 C49 C50 C51 C52 C53 C54 C55 C56 C57 C58: library part CAPACITOR, "CAPACITOR SMD - KEMET"
C6 C11 C12: library part Alu_Capacitor
COM1: "HR911105A"
D1 D2 D5: "DIODE SCHOTTKY 40V 5A SMA", Supplier Part Number 1=08X3002, Supplier 1=Newark
D3 D4: "TVS Diode, SM712 Series, 31V Clamp, 600W Peak Pulse, Surface Mount, SOT23-3"
D6: "17.5V Clamp 12A (8/20µs) Ipp Tvs Diode Surface Mount SOT-23-6"
DC1: "Jack DC IN (Hole)"
EN1: "Bourns PEC11R-4015F-S0024"
F1 F2 F3 F4: "Fuse Resettable 30V/0.2A; Size 4.55 x 3.24mm"
FR1: library part "Ferrite Beads", "SMD"
Fuse1: library part Fuse, "Nano2 SMD FF submin fuse w/holder, 4A"
KF1 KF2: "KF Terminal Block Plug-in"
L1 L2: library part Inductor_1_SMD
LCD1: "LCD 2004"
LED1 LED2 LED3 LED4 LED5 LED10 LED12 LED15: library part LED_SMD, "LED SMD"
MH1 MH3 MH4: "Mounting hole"
Q6 Q7: "Bipolar (BJT) Transistor NPN 25 V 1.5 A 100MHz 300 mW Surface Mount SOT-23-3"
R1 R2 R3 R4 R5 R6 R7 R8 R9 R10 R11 R12 R13 R14 R15 R16 R17 R18 R19 R20 R21 R22 R23 R24 R25 R26 R27 R28 R29 R30 R31 R32 R33 R34 R35 R36 R37 R38 R39 R40 R41 R42 R43 R44 R45 R46 R47 R48 R49 R50 R51 R55 R61 R65 R66 R68 R69 R70 R72 R74 R75 R76 R78 R79 R80 R81 R82 R83: library part RESISTOR, "Resistor SMD - YAGEO"
SW1: "Switch 3 Pins"
SW2 SW8 SW9: "SMD Button", Supplier Part Number 1=35AH5160, Supplier 1=Newark
SW3: "Switch DIP ON OFF SPST 3 Flush Slide 0.1A 20VDC Gull Wing 2000Cycles 2.54mm SMD T/R"
SW5 SW6 SW7: "DIP Button 4 Pins"
TP1 TP2 TP3 TP4 TP5 TP6 TP10 TP11 TP15: library part "TEST POINT", "Test Point", Supplier Part Number 1=36-5014-ND, Supplier 1=Digikey
U1: "Buck DC to DC Converter"
U2: "Buck Converter"
U3: "Isolated - Converter"
U4: "Hardwired TCP/IP embedded Ethernet controller"
U5 U10: "1/1 Transceiver Half RS422, RS485"
U6 U7 U8 U9 U11 U12: "TLP185 Optoisolator Transistor Output 3750Vrms 1 Channel 4-SOP"
U13: "EEPROM Memory IC 256Kb (32K x 8), I2C Protocol"
U14: "Extremely Accurate I²C-Integrated RTC/TCXO/Crystal"
U15: "Bluetooth, WiFi 802.11b/g/n, Bluetooth v5.0 Transceiver Module 2.4GHz Antenna Not Included, U.FL Surface Mount"
U16: "USB to serial chip CH340"
USB1: "Type 16 Pins (Include 4 GND Pins)"
VBAT1: library part "Battery Base", "Battery Base CR2032"
VR1: library part "VARIABLE RESISTOR", "VR"
X1: "SMD CRYSTAL", Supplier Part Number 1=ECS-80-8-33Q-ADS, Supplier 1=Avnet

## Via types
v1: diameter 0.6, hole 0.3, Top Layer to Bottom Layer, tented both sides, 85 vias
v2: diameter 0.6, hole 0.3, Top Layer to Bottom Layer, 14 vias
v3: diameter 0.25, hole 0.15, Top Layer to Bottom Layer, 1 vias

## Nets (pads, with @x,y where several pads share a name; then routed paths per layer and width w, separated by ;. In a path a pad name is that pad's centre, name@x,y a point inside that pad or via, vN(x,y) a via of type N, cw(c..) or ccw(c..) an arc to the next point about the centre after c; other vN are vias at no path point)
+3.3V: C1.1 C2.1 C11.1 C16.2 C17.2 C35.2 C36.2 C37.2 C38.2 C52.2 C53.2 C54.2 C55.2 FR1.1 J1.10 L2.2 R3.1 R9.1 R10.2 R11.2 R25.1 R26.2 R27.2 R28.2 R30.2 R31.1 R32.1 R34.2 R36.2 R40.2 R42.2 R45.2 R47.2 R51.2 R61.1 R65.2 R66.2 R68.2 R69.2 R70.2 R72.1 R74.2 R78.1 R81.1 TP5.1 TP15.1 U2.3 U4.28 U13.8 U14.2 U15.2 U16.16 | length 214.3
  Top Layer w0.295: v1@14.478,52.788 14.846,53.156 U4.28@14.846,54.261
  Top Layer w0.38: v1(17.145,41.402) 19.571,38.976 R78.1@19.571,31.496 v1(24.13,31.496) ; R11.2@26.561,51.72 26.8,51.481 26.878,51.481 28.056,50.303 28.444,50.303 28.594,50.153 R31.1@28.594,50.133 ; R31.1@28.467,50.133 R31.1@28.702,49.898
  Top Layer w0.4: FR1.1@9.525,49.656 9.644,49.656 10.008,50.02 10.008,50.139 11.19,51.321 C17.2@12.065,51.321 ; C17.2@12.065,51.181 C16.2@14.351,51.181 ; C16.2@14.478,51.321 C16.2@14.478,51.448 v1(14.478,52.705) v1@14.478,52.788 ; U16.16@22.689,26.924 22.799,27.034 23.542,27.034 23.838,27.33 23.838,27.521 v1(23.876,27.559) ; v1(24.511,54.864) 26.543,52.832 26.543,51.575 R11.2@26.543,51.702 ; R25.1@26.15,92.457 26.182,92.426 26.918,92.426 ; 29.591,91.257 29.591,91.821 30.002,92.232 R28.2@30.472,92.232 ; R28.2@30.472,92.207 R28.2@30.472,92.232 ; 32.513,92.457 R28.2@30.722,92.457 30.497,92.232 R28.2@30.472,92.232 ; v1(70.104,33.147) 70.11,33.153 71.114,33.153 R40.2@71.12,33.16 R36.2@72.771,33.16 72.714,33.217 72.714,34.653 72.696,34.671 72.696,34.759 R45.2@72.657,34.798 ; R47.2@90.5,31.339 90.602,31.238 92.305,31.238 v2(92.343,31.2)
  Top Layer w0.6: TP15.1@15.875,15.113 15.989,14.999 R74.2@20.701,14.999 R81.1@22.987,14.999 R65.2@25.273,14.999 R72.1@27.432,14.999 R66.2@29.718,14.999 ; R10.2@17.742,51.638 17.767,51.638 18.245,51.16 v1(18.589,51.16) ; v1(24.511,61.976) 24.511,62.611 26.162,64.262 26.162,86.106 28.436,88.38 R32.1@28.436,90.907 ; 32.513,92.457 R27.2@33.008,92.457 R26.2@35.421,92.457 37.337,92.457 v1(45.593,84.201) ; v1(49.911,77.978) 49.911,70.367 52.11,68.169 52.11,64.558
  Top Layer w0.8: R3.1@50.432,64.516 50.432,64.533 50.457,64.558 52.11,64.558 54.718,64.558 55.118,64.158 C11.1@55.118,63.24
  Bottom Layer w0.38: v1(14.478,52.705) 14.52,52.663 14.748,52.663 17.145,50.266 ; v1(17.145,41.402) 17.145,50.266 ; v1(24.511,54.864) 20.955,51.308 18.814,51.308 18.736,51.308 18.292,50.863 17.742,50.863 17.145,50.266
  Bottom Layer w0.4: v1(24.511,54.864) v1(24.511,61.976) ; v1(70.104,33.147) 71.247,34.29 v1(87.122,34.29) 87.16,34.252 87.16,34.097 90.057,31.2 v2(92.343,31.2) ; C35.2@74.136,41.899 74.435,42.198 74.511,42.198 74.511,42.888 74.549,42.926 ; C35.2@74.536,41.912 C36.2@76.409,41.912 ; C36.2@76.435,41.841 76.627,41.648 77.043,41.648 77.162,41.529 v1(77.216,41.529)
  Bottom Layer w0.6: v1(23.876,27.559) 23.876,27.619 24.13,27.873 v1(24.13,31.496) ; J1.10@30.734,78.105 30.861,77.978 v1(49.911,77.978) 49.911,79.883 v1(45.593,84.201)
+3.3V_RJ45: C18.2 C19.2 C20.2 C21.2 C22.2 C23.2 FR1.2 R8.1 R16.2 R17.2 R19.1 U4.4 U4.8 U4.11 U4.15 U4.17 U4.21
+5V: C3.1 C4.1 C10.1 C12.1 C13.1 C42.2 C43.2 D5.2 J1.9 L1.2 LCD1.2 LCD1.15 R2.1 R5.1 TP6.1 U2.1 U3.2 VR1.1
+5V_RS485: C14.1 C31.1 C32.1 C33.1 C34.1 R35.2 R37.2 R39.1 R41.2 R43.2 R46.2 R48.2 R50.1 R55.1 TP11.1 U3.3 U5.8 U10.8 | length 67.8
  Top Layer w0.6: R39.1@59.55,17.018 59.526,17.018 59.475,17.069 59.563,17.157 v2(59.563,18.161) ; U5.8@65.659,19.273 65.659,20.464 66.01,20.815 R46.2@69.977,20.815 69.977,18.767 R41.2@69.977,18.555 v1@71.107,18.555 ; R55.1@70.993,14.364 70.995,14.364 71.12,14.489 v1(71.12,15.875) 72.009,16.764 R50.1@76.187,16.764 ; U10.8@81.788,19.146 81.788,20.209 82.394,20.815 R37.2@83.82,20.815 R48.2@86.106,20.815
  Top Layer w0.8: TP11.1@91.059,17.399 91.059,19.177 89.903,20.333 C14.1@88.265,20.333 v1(88.265,21.257) 91.138,24.13 U3.3@93.794,24.13
  Bottom Layer w0.6: v2(59.563,18.161) 59.944,18.542 v1(71.12,18.542) v1(71.12,15.875) ; C34.1@72.288,18.922 C33.1@73.986,18.922 83.312,18.922 ; 82.931,18.923 83.912,18.923 C32.1@83.947,18.958 ; C32.1@84.328,18.783 85.915,18.783 85.916,18.784 87.151,18.784 88.265,19.898 v1(88.265,21.257)
+VCC: C6.1 C7.1 C8.1 Fuse1.2 R4.1 U1.7 | length 2.3
  Top Layer w0.6: U1.7@73.564,76.962 75.299,76.962 75.542,76.719 R4.1@75.717,76.719
A1: F2.2 KF1.2 | length 7.2
  Top Layer w1: F2.2@58.107,14.268 58.107,11.235 58.928,10.414 KF1.2@61.976,10.414
A2: F4.2 KF2.2 | length 4.4
  Top Layer w1: F4.2@74.481,14.224 74.731,13.974 74.731,12.024 75.946,10.809 KF2.2@75.946,10.414
B1: F1.2 KF1.1 | length 3.8
  Top Layer w1: 68.453,11.176 68.58,11.303 68.58,13.247 68.58,14.038 F1.2@68.521,14.097 F1.2@68.521,13.247
B2: F3.2 KF2.1 | length 7.3
  Top Layer w1: KF2.1@81.026,10.414 84.201,10.414 84.904,11.117 F3.2@84.904,14.224
CC1: R83.1 USB1.A5 | length 5.2
  Top Layer w0.254: USB1.A5@8.191,22.461 9.652,22.461 11.067,23.876 R83.1@12.814,23.876
CC2: R82.1 USB1.B5 | length 5.1
  Top Layer w0.254: USB1.B5@8.191,19.461 9.495,19.461 10.414,18.542 R82.1@12.941,18.542
CRYSTAL_N: C29.2 R29.1 U4.30 X1.3 | length 15.9
  Top Layer w0.28: C29.2@12.192,43.294 12.355,43.131 X1.3@14.874,43.131 14.974,43.131 16.002,44.159 16.002,46.444 15.1,47.346 15.1,47.396 16.23,48.526 16.23,48.768 16.002,48.996 16.002,49.784 15.719,50.067 15.719,53.177 15.829,53.287 15.829,53.374 15.837,53.382 U4.30@15.837,54.647
CRYSTAL_P: C28.2 R29.2 U4.31 X1.1 | length 13.3
  Top Layer w0.28: U4.31@16.346,54.893 16.346,53.668 16.363,53.651 16.363,53.066 16.253,52.956 16.253,50.289 16.536,50.005 16.536,49.217 16.764,48.989 16.764,45.341 X1.1@17.174,44.931 17.388,44.717 C28.2@19.939,44.717
DATA_D_N: D6.3 D6.4 U16.6 USB1.A7 USB1.B7 | length 13.2
  Top Layer w0.254: USB1.A7@8.191,20.961 8.199,20.953 9.742,20.953 9.745,20.955 10.541,20.955 11.081,20.415 11.675,20.415 D6.3@11.831,20.259 D6.4@14.331,20.259 14.544,20.259 14.859,20.574 U16.6@17.189,20.574
  Top Layer w0.27: USB1.A7@8.191,20.961 6.889,20.961 6.731,21.119 6.731,21.803 6.889,21.961 USB1.B7@8.191,21.961
DATA_D_P: D6.1 D6.6 U16.5 USB1.A6 USB1.B6 | length 9.4
  Top Layer w0.254: USB1.A6@8.191,21.461 9.532,21.461 9.534,21.463 10.486,21.463 11.054,22.03 11.702,22.03 D6.1@11.831,22.159 D6.6@14.331,22.159 14.606,22.159 14.921,21.844 U16.5@17.189,21.844
DEBUG_D_N: U15.36 U16.2 | length 39.6
  Top Layer w0.381: U16.2@17.189,25.654 17.534,25.654 17.852,25.336 18.86,25.336 20.447,26.924 20.447,27.813 23.3,30.666 45.397,30.666 48.259,33.528 48.259,35.188 48.04,35.408 48.04,36.976 47.982,37.034 47.982,37.499 U15.36@47.722,37.759
DEBUG_D_P: U15.37 U16.3 | length 40.6
  Top Layer w0.381: U16.3@17.189,24.384 17.534,24.384 17.852,24.701 19.123,24.701 21.082,26.661 21.082,27.55 23.563,30.031 45.66,30.031 48.894,33.265 48.894,35.451 48.675,35.671 48.675,36.976 48.732,37.034 48.732,37.499 U15.37@48.992,37.759